# EAGLE board TestOscillatorBoard (EAGLE 7.6.0)
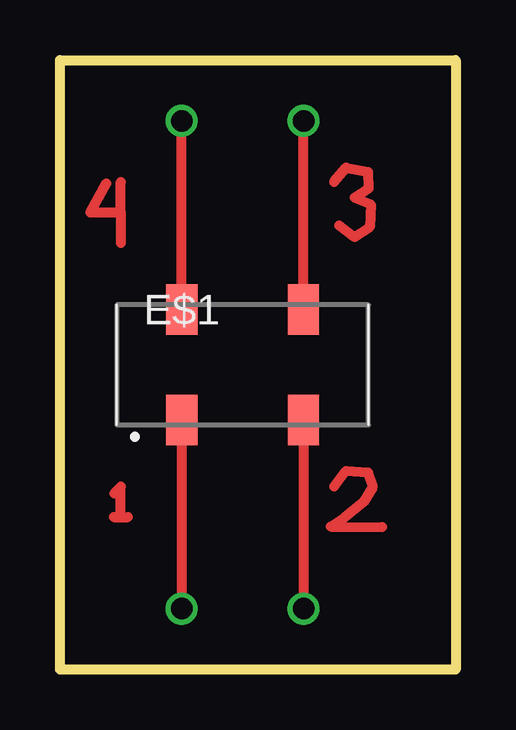
[diagram p0: board, top side]

Size 16.51 x 25.4 mm. Coordinates in mm from the lower left corner, seen from the top.
Outline: 0,0 0,25.4 16.51,25.4 16.51,0 0,0
Copper layers (1*16): Top 0.035mm / dielectric 1.5mm / Bottom 0.035mm
Design rules "default": minimum track width 10mil, minimum drill 24mil, track to track 8mil, track to pad 8mil, pad to pad 8mil, via to via 8mil, smd to smd 8mil, copper to edge 40mil, drill to drill 8mil, minimum pad ring 10mil, minimum via ring 8mil, stop-mask expansion 4mil, vias tented up to drill 0mil, thermal gap 10mil

## Footprints (pad centres in the part's own frame; a part is rotated, then mirrored left to right if it is on the bottom)
SG-636 = smd 1.3 x 2.1: 1 -2.54,-2.3; 2 2.54,-2.3; 3 2.54,2.3; 4 -2.54,2.3

## Placement (x,y rotation side)
E$1  [SG-636]  7.62,12.7 0 top

## Library data of the parts
E$1 = SG-636PCW_50.0000MC3__ROHS

## Tracks (layer width: path | path; a pad name or v marks a point on that pad's centre or on a via)
S$1  (via drill 0.89)
  Top 0.406: 5.08,15.24 v5.08,22.86
S$2  (via drill 0.89)
  Top 0.406: 10.16,15.24 v10.16,22.86
S$3  (via drill 0.89)
  Top 0.406: 5.08,10.16 v5.08,2.54
S$4  (via drill 0.89)
  Top 0.406: 10.16,10.16 v10.16,2.54
S$5
  Top 0.406: 2.26,7.34 2.54,7.62 2.54,6.35 2.24,6.36 2.83,6.36
S$6
  Top 0.406: 11.43,7.62 11.93,8.29 12.85,8.22 13.05,7.63 12.65,6.97 11.87,6.33 11.3,5.96 13.44,5.94
S$7
  Top 0.406: 11.43,20.32 11.93,20.92 12.85,20.74 12.87,20.04 12.28,19.67 12.96,19.38 12.92,18.44 12.28,18.02 11.65,18.5
S$8
  Top 0.406: 1.94,20.26 1.27,19.05 2.54,19.05 | 2.54,19.05 2.54,20.32 | 2.54,19.05 2.54,17.78